# Altium PCB MCU_BOARD.PcbDoc
Units mm, origin at the board's own origin, x right, y up, seen from the top; angles counter-clockwise.
Board outline 89.4 x 99.75 mm, 2 copper layers (Top Layer, Bottom Layer), stack 1.569 mm thick; 81 components, 55 nets, 354 pads, 305 vias.
Unrouted connection lines stored in the file: 1.
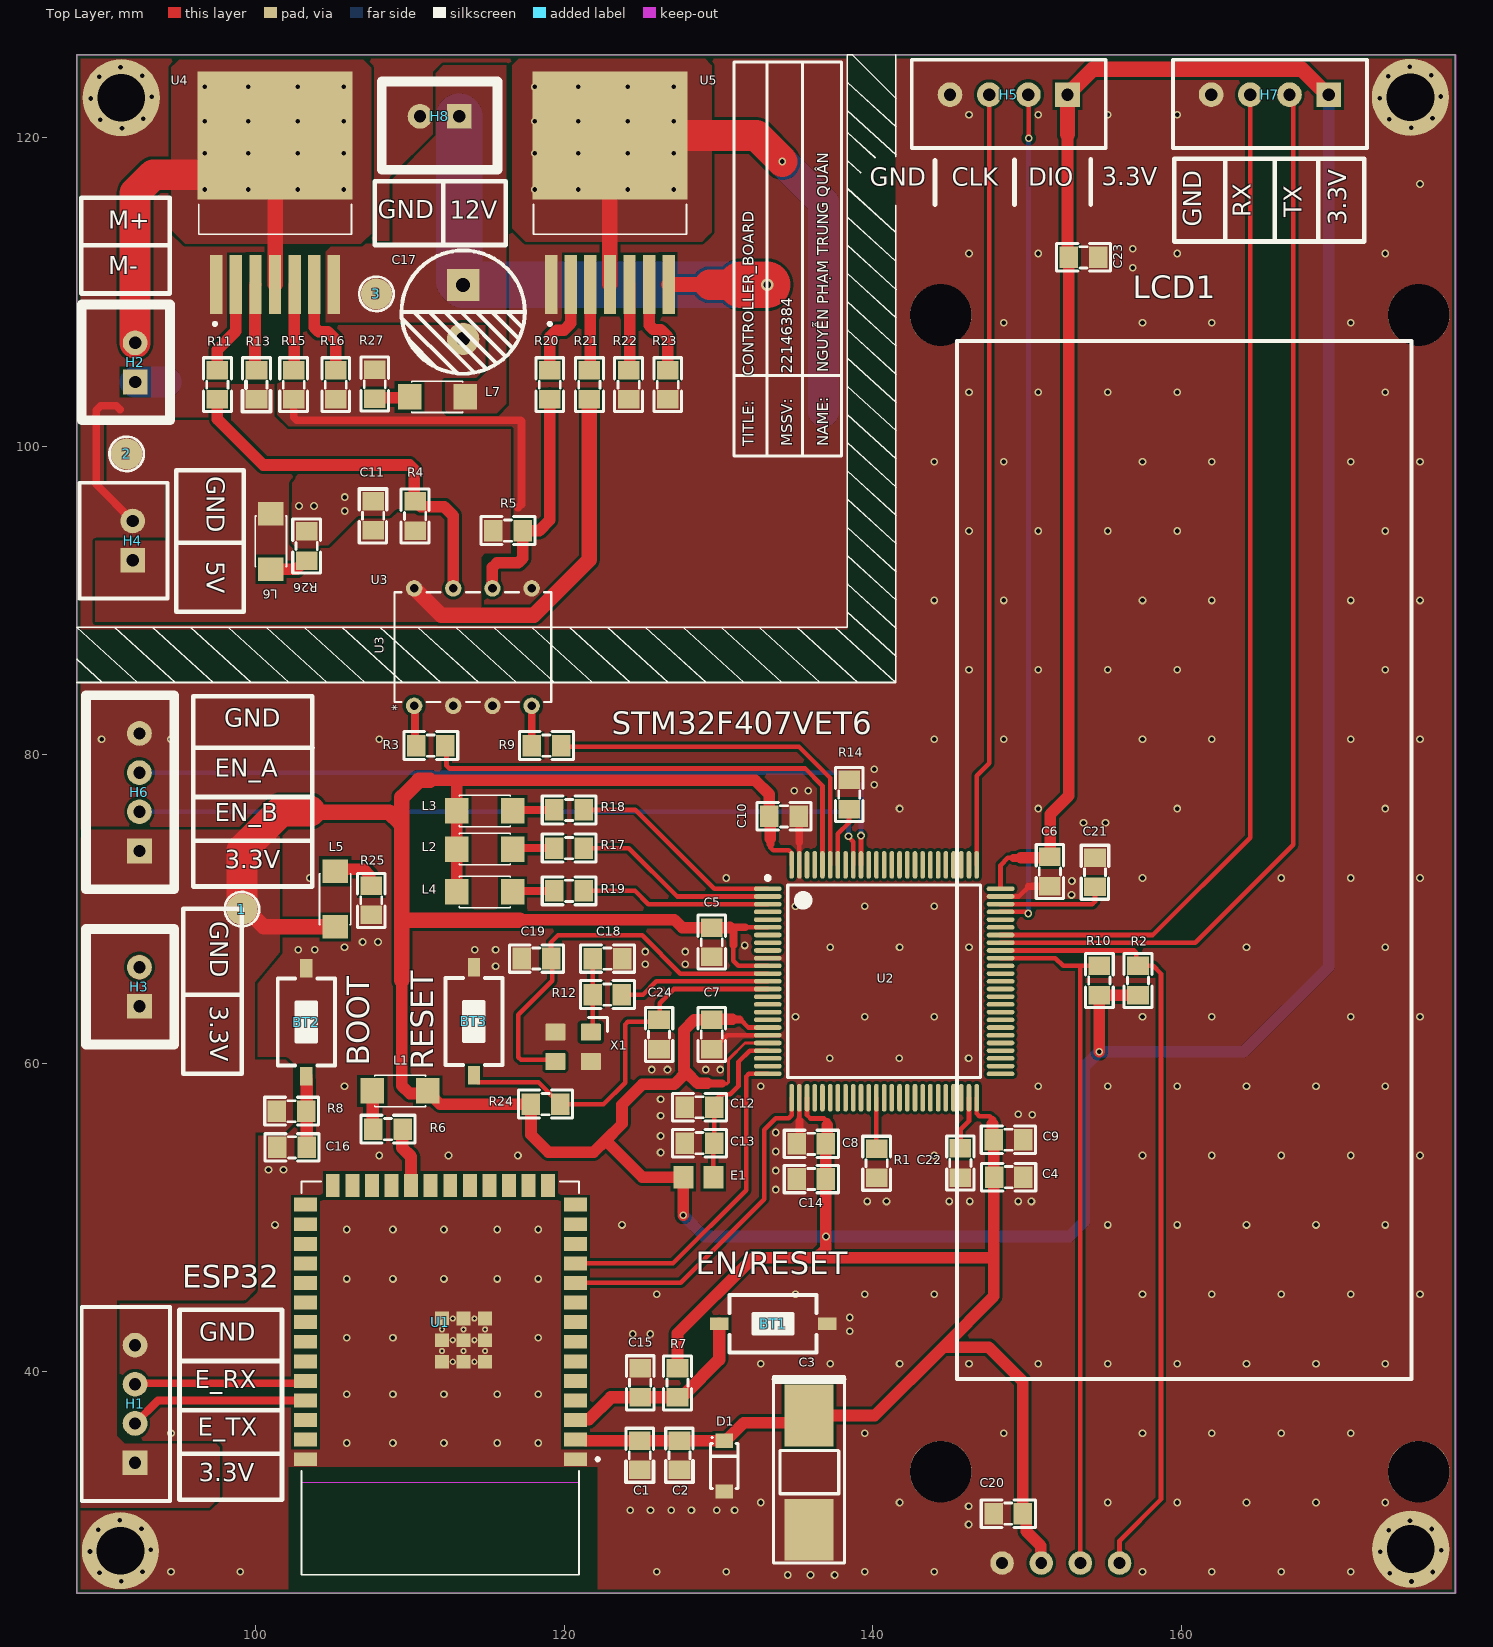
[diagram p0: Top Layer view]
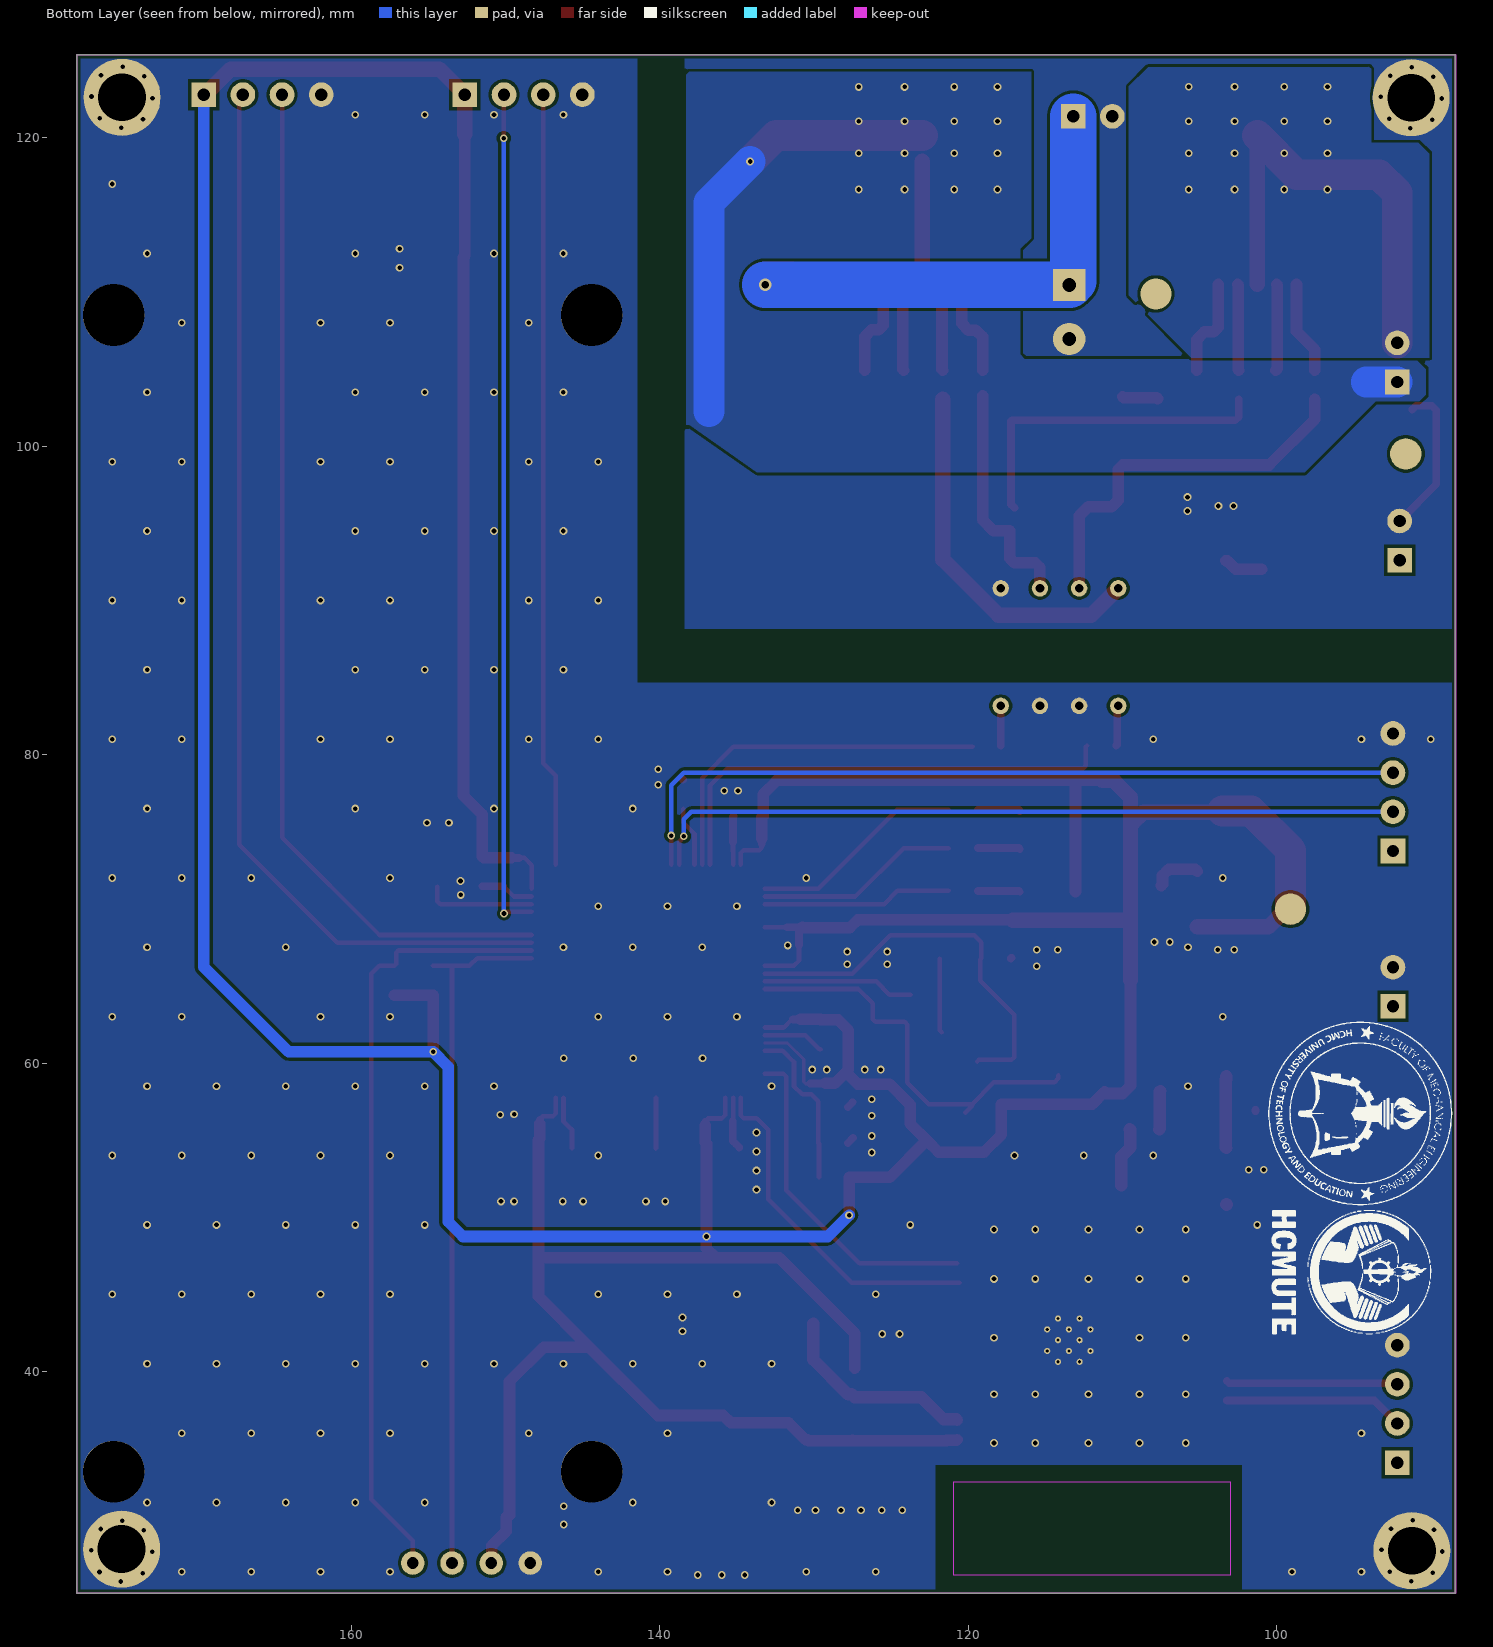
[diagram p1: Bottom Layer view, seen from below]
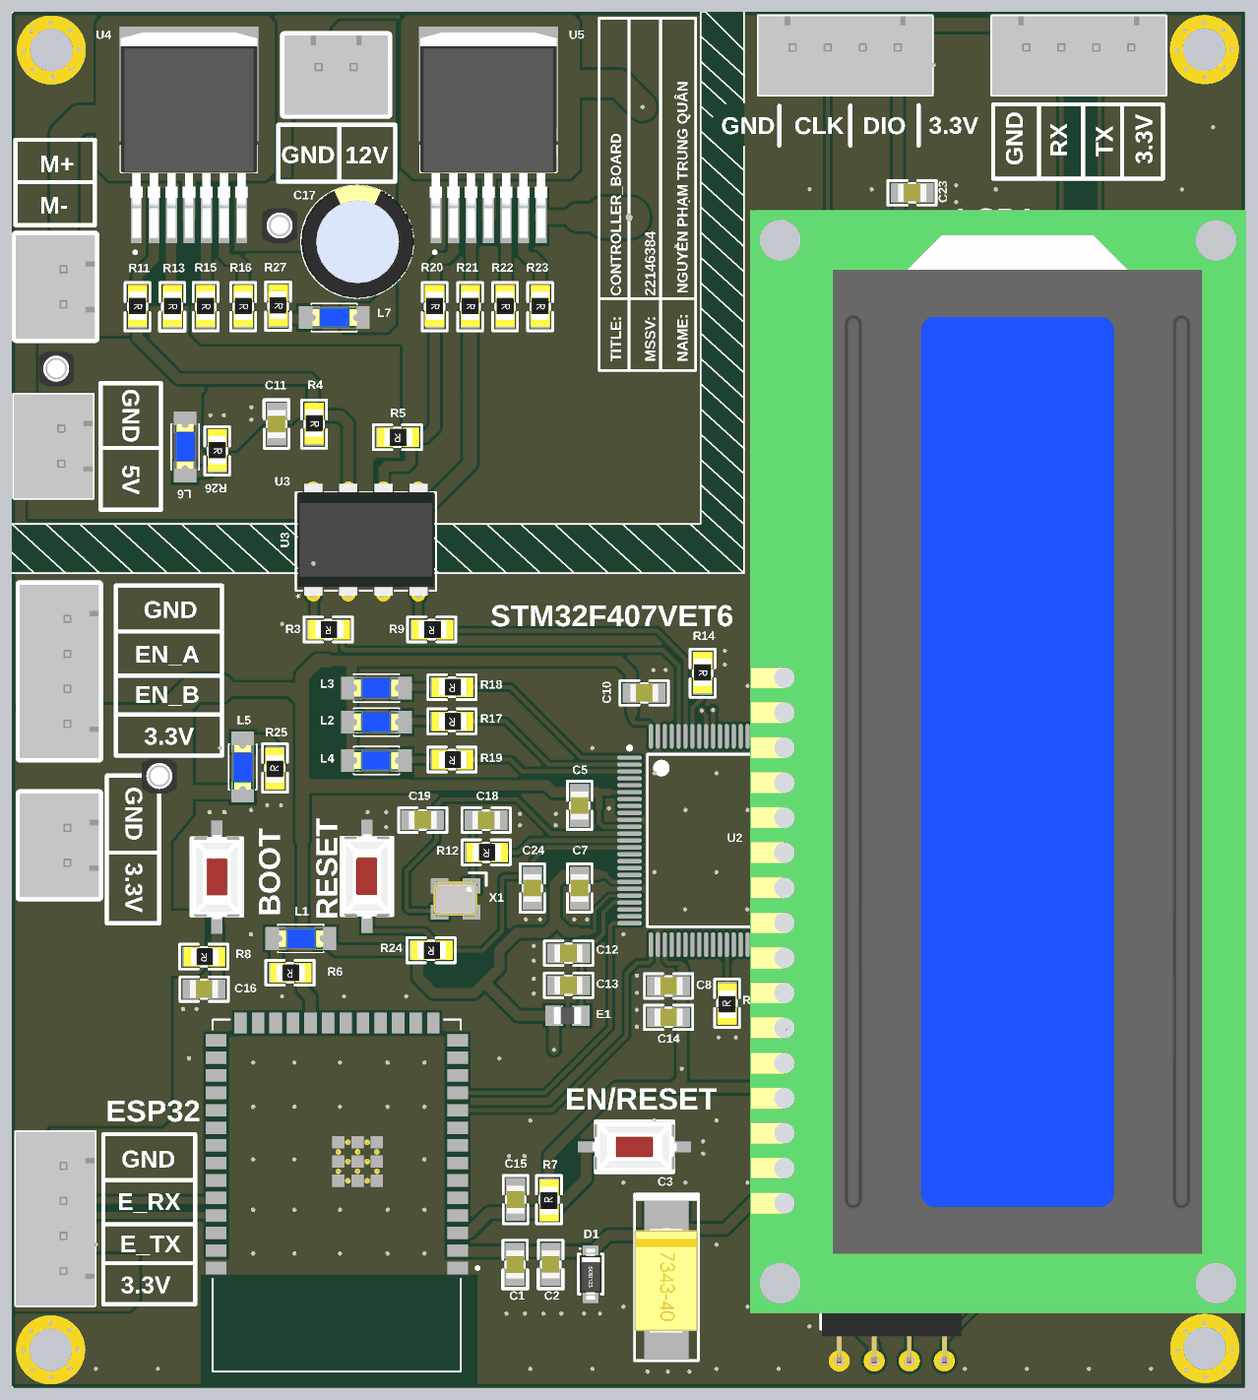
[diagram p2: 3D render of the assembled board from above, using the file's embedded part models]

## Layer stack, top to bottom
Top Solder: solder mask 0.0254, SM-001, Dk 4
Top Layer: signal copper 0.035
Dielectric 1: core 1.4986, Core-043, Dk 4.3
Bottom Layer: signal copper 0.035
Bottom Solder: solder mask 0.0254, SM-001, Dk 4

## Board outline
88.4,25.625 88.4,125.375 177.8,125.375 177.8,25.625

## Design rules (kind name [scope] priority, off if disabled: settings)
Clearance [All] p1: gap=0.2 ignorepadtopadclearanceinfootprint=FALSE
HoleSize [All] p1: absolutevalues=TRUE maxlimit=5 minlimit=0.025 maxpercent=80.000 minpercent=20.000
HoleToHoleClearance [All] p1: gap=0.01 allowstackedmicrovias=TRUE
PolygonConnect [All] p1: connectstyle=Direct reliefconductorwidth=0.254 reliefentries=4 polygonreliefangle="90 Angle" airgapwidth=0.254
RoutingVias [All] p1: holewidth=0.3 width=0.5 viastyle="Through Hole" minholewidth=0.3 minwidth=0.5 maxholewidth=0.3 maxwidth=0.5
SilkToSilkClearance [All] p1: silktosilkclearance=0.01
SilkToSolderMaskClearance [IsPad] p1: minsilkscreentomaskgap=0 clearancetoexposedcopper=TRUE
SolderMaskExpansion [IsVia] p1: expansion=0.102 istentingtop=TRUE useseparateexpansions=TRUE expansionbottom=0.102 istentingbottom=TRUE
SupplyNets "Schematic Supply Nets_1" [InNet('3.3VDDA')] p1: voltage=0.000
SupplyNets "Schematic Supply Nets_5" [InNet('5V_CS')] p2: voltage=0.000
SupplyNets "Schematic Supply Nets_4" [InNet('12V_CS')] p3: voltage=0.000
SupplyNets "Schematic Supply Nets_3" [InNet('GND_CS')] p4: voltage=0.000
SupplyNets "Schematic Supply Nets_2" [InNet('GND')] p5: voltage=0.000
SupplyNets "Schematic Supply Nets" [InNet('3.3V')] p6: voltage=0.000
UnRoutedNet [All] p1: checkbadconnections=TRUE
Width [All] p1: maxlimit=3 minlimit=0.2 preferedwidth=0.3
25 further rules are at their usual default settings.

## Components (designator, comment, footprint, x,y, rotation, side; value= is the part's Value field where it differs from the comment)
1 "3.3V" TP1 99.1,69.975 r90 top value="Test Point"
2 "5V" TP1 91.625,99.5 r90 top value="Test Point"
3 "12V" TP1 107.825,109.875 r90 top value="Test Point"
BT1 "Nut Nhan 2 Chan SMD 3x6x2.5" "Nut Nhan 2 Chan SMD 3x6x2.5" 133.55,43.09 r0 top
BT2 "Nut Nhan 2 Chan SMD 3x6x2.5" "Nut Nhan 2 Chan SMD 3x6x2.5" 103.275,62.65 r90 top
BT3 "Nut Nhan 2 Chan SMD 3x6x2.5" "Nut Nhan 2 Chan SMD 3x6x2.5" 114.15,62.7 r270 top
C1 "104" "tu 0805" 124.9,34.565 r270 top
C2 "22uf" "tu 0805" 127.475,34.565 r90 top
C3 "100uF" "tu tantalum smd7343" 135.875,33.44 r270 top
C4 "106" "tu 0805" 148.825,52.6 r0 top
C5 "104" "tu 0805" 129.572,67.84 r270 top
C6 "104" "tu 0805" 151.5,72.425 r270 top
C7 "104" "tu 0805" 129.575,61.85 r270 top
C8 "104" "tu 0805" 136.025,54.75 r180 top
C9 "104" "tu 0805" 148.8,55.025 r0 top
C10 "104" "tu 0805" 134.25,76 r0 top
C11 "104" "tu 0805" 107.601,95.479 r90 top
C12 "104" "tu 0805" 128.775,57.125 r180 top
C13 "106" "tu 0805" 128.775,54.8 r180 top
C14 "106" "tu 0805" 136.025,52.475 r180 top
C15 "106" "tu 0805" 124.925,39.263 r90 top
C16 "104" "tu 0805" 102.35,54.525 r180 top
C17 "100uF" "tu hoa 8mm" 113.45,108.7 r270 top
C18 "22pF" "tu 0805" 122.797,66.775 r0 top
C19 "22pF" "tu 0805" 118.2,66.775 r180 top
C20 "104" "tu 0805" 148.8,30.775 r180 top
C21 "225" "tu 0805" 154.422,72.371 r90 top
C22 "225" "tu 0805" 145.7,53.525 r270 top
C23 "104" "tu 0805" 153.675,112.25 r0 top
C24 "104" "tu 0805" 126.15,61.85 r270 top
D1 "BZT52H-C3V3" SOD123 130.375,33.865 r90 top
E1 "LI0805H121R-10" FB_LI0805H121R-10 128.7,52.6 r180 top
H1 "LOADER ESSP32" XH2.54M-4 92.171,34.087 r90 top
H2 "MOTOR" XH2.54M-2 92.175,104.16 r90 top
H3 "Header 2P 2.54 Duc Thang" XH2.54M-2 92.456,63.675 r90 top
H4 "Header 2P 2.54 Duc Thang" XH2.54M-2 92.025,92.61 r90 top
H5 "Header 4P 2.54 Duc Thang" XH2.54M-4 152.64,122.8 r180 top
H6 "ENCODER" XH2.54M-4 92.456,73.75 r90 top
H7 "UART3" XH2.54M-4 169.575,122.8 r180 top
H8 "Header 2P 2.54 Duc Thang" XH2.54M-2 113.189,121.387 r180 top
L1 "LED 1206" LED-1206-Blue 111.157,58.19 r180 top
L2 "LED 1206" LED-1206-Blue 113.043,73.875 r0 top
L3 "LED 1206" LED-1206-Blue 113.043,76.348 r0 top
L4 "LED 1206" LED-1206-Blue 113.043,71.098 r0 top
L5 "LED 1206" LED-1206-Blue 105.15,68.825 r90 top
L6 "LED 1206" LED-1206-Blue 100.975,95.625 r270 top
L7 "LED 1206" LED-1206-Blue 113.582,103.2 r180 top
LCD1 "LCD 1602" LCD-I2C-1602 141.918,31.004 r90 top
R1 "10k" "tro smd 0805" 140.2,53.5 r90 top
R2 "10k" "tro smd 0805" 157.15,65.35 r90 top
R3 "220R" "tro smd 0805" 111.35,80.525 r180 top
R4 "10k" "tro smd 0805" 110.395,95.479 r270 top
R5 "10k" "tro smd 0805" 116.364,94.463 r180 top
R6 "10k" "tro smd 0805" 108.575,55.65 r180 top
R7 "10k" "tro smd 0805" 127.289,39.261 r90 top
R8 "10k" "tro smd 0805" 102.329,56.814 r180 top
R9 "220R" "tro smd 0805" 118.85,80.525 r180 top
R10 "10k" "tro smd 0805" 154.766,65.35 r270 top
R11 "10k" "tro smd 0805" 97.575,103.988 r270 top
R12 "220R" "tro smd 0805" 122.8,64.375 r180 top
R13 "10k" "tro smd 0805" 100.108,103.988 r270 top
R14 "10k" "tro smd 0805" 138.55,77.425 r270 top
R15 "10k" "tro smd 0805" 102.521,103.988 r270 top
R16 "10k" "tro smd 0805" 105.249,103.988 r270 top
R17 "10k" "tro smd 0805" 120.325,73.877 r180 top
R18 "10k" "tro smd 0805" 120.325,76.35 r180 top
R19 "10k" "tro smd 0805" 120.325,71.1 r180 top
R20 "10k" "tro smd 0805" 119.125,103.988 r270 top
R21 "10k" "tro smd 0805" 121.698,103.988 r270 top
R22 "10k" "tro smd 0805" 124.238,103.988 r270 top
R23 "10k" "tro smd 0805" 126.778,103.988 r270 top
R24 "10k" "tro smd 0805" 118.8,57.275 r180 top
R25 "10k" "tro smd 0805" 107.425,70.55 r90 top
R26 "10k" "tro smd 0805" 103.361,93.529 r270 top
R27 "10k" "tro smd 0805" 107.775,104.025 r270 top
U1 "ESP32-S3-WROOM-1-N4" XCVR_ESP32-S3-WROOM-1-N4 111.975,39.565 r180 top
U2 "STM32F407VET6" STM-LQFP100_N 140.748,65.3 r0 top
U3 "HCPL2631" DIP_PL2631_ONS 110.268,83.16 r90 top
U4 "BTS7960B" DPAK127P1490X440-8N 101.251,116.434 r90 top
U5 "BTS7960B" DPAK127P1490X440-8N 122.968,116.434 r90 top
X1 "8Mhz" XTAL_3225 120.575,61.05 r180 top

## Footprints (in the part's own frame and the unit in brackets; to place one, negate y for a bottom-side part, rotate by r counter-clockwise, add the part's x,y. Pads: shape width x height; smd on the part's side, far side on the other; paste and mask are expansions set on the pad)
DIP_PL2631_ONS [mil]
  round 42 hole 22: 1(0,0) 2(0,-100) 3(0,-200) 4(0,-300) 5(300,-300) 6(300,-200) 7(300,-100) 8(300,0)
  silkscreen extent 10,-350 290,50, body extent -5,-345 315,45, height 205
DPAK127P1490X440-8N [mm]
  rect 3.81x0.8 smd: 1(-5.95,3.81) 2(-5.95,2.54) 3(-5.95,1.27) 4(-5.95,0) 5(-5.95,-1.27) 6(-5.95,-2.54) 7(-5.95,-3.81)
  rect 8.29x10.07 smd: 8(3.71,0)
  silkscreen extent -8.6,-4.95 -0.75,4.95, body extent -7.45,-4.95 7.45,4.95, height 4.4
FB_LI0805H121R-10 [mm]
  rect 1.285x1.47 smd: 1(-0.973,0) 2(0.973,0)
  body extent -1,-0.63 1,0.63, height 1.1
LCD-I2C-1602 [mm]
  round 1.524 hole 0.762: 1(-3.429,-6.477) 2(-3.429,-9.017) 3(-3.429,-11.557) 4(-3.429,-14.097)
  round 4 hole 4: 13(2.5,-2.5) 13(2.5,-33.5) 13(77.5,-33.5) 13(77.5,-2.5)
  silkscreen extent 8.51,-33.02 75.82,-3.56, body extent -3.6,-36 80,0, height 17
LED-1206-Blue [mil] "Compoment SMD 120x60mil"
  rect 60x65 smd: 1(0,0) 2(142,0)
  silkscreen extent 6,-40 136,40, body extent 7,-31 133,32, height 43
"Nut Nhan 2 Chan SMD 3x6x2.5" [mm] "Switch SMD type"
  rect 1.2x0.8 smd: 1(-3.5,0) 2(3.5,0)
  silkscreen extent -2.82,-1.85 2.82,1.85, body extent -3.05,-1.85 3.05,1.85, height 2.5
SOD123 [mm] "Molded Diode, 2-Leads, Body 2.7x1.6mm, IPC Medium Density"
  rect 0.91x1.143 smd: 1(-1.64,0) 2(1.64,0)
  silkscreen extent -1.45,-0.9 1.9,0.9, body extent -1.85,-0.78 1.85,0.77, height 1.35
STM-LQFP100_N [mm] "Thin QFP, 100-Leads, Body 14x14mm, Pitch 0.5mm, IPC Medium Density"
  oval 1.8x0.3 smd: 1(-7.55,6) 2(-7.55,5.5) 3(-7.55,5) 4(-7.55,4.5) 5(-7.55,4) 6(-7.55,3.5) 7(-7.55,3) 8(-7.55,2.5) 9(-7.55,2) 10(-7.55,1.5) 11(-7.55,1) 12(-7.55,0.5) 13(-7.55,0) 14(-7.55,-0.5) 15(-7.55,-1) 16(-7.55,-1.5) 17(-7.55,-2) 18(-7.55,-2.5) 19(-7.55,-3) 20(-7.55,-3.5) 21(-7.55,-4) 22(-7.55,-4.5) 23(-7.55,-5) 24(-7.55,-5.5) 25(-7.55,-6) 51(7.55,-6) 52(7.55,-5.5) 53(7.55,-5) 54(7.55,-4.5) 55(7.55,-4) 56(7.55,-3.5) 57(7.55,-3) 58(7.55,-2.5) 59(7.55,-2) 60(7.55,-1.5) 61(7.55,-1) 62(7.55,-0.5) 63(7.55,0) 64(7.55,0.5) 65(7.55,1) 66(7.55,1.5) 67(7.55,2) 68(7.55,2.5) 69(7.55,3) 70(7.55,3.5) 71(7.55,4) 72(7.55,4.5) 73(7.55,5) 74(7.55,5.5) 75(7.55,6)
  oval 0.3x1.8 smd: 26(-6,-7.55) 27(-5.5,-7.55) 28(-5,-7.55) 29(-4.5,-7.55) 30(-4,-7.55) 31(-3.5,-7.55) 32(-3,-7.55) 33(-2.5,-7.55) 34(-2,-7.55) 35(-1.5,-7.55) 36(-1,-7.55) 37(-0.5,-7.55) 38(0,-7.55) 39(0.5,-7.55) 40(1,-7.55) 41(1.5,-7.55) 42(2,-7.55) 43(2.5,-7.55) 44(3,-7.55) 45(3.5,-7.55) 46(4,-7.55) 47(4.5,-7.55) 48(5,-7.55) 49(5.5,-7.55) 50(6,-7.55) 76(6,7.55) 77(5.5,7.55) 78(5,7.55) 79(4.5,7.55) 80(4,7.55) 81(3.5,7.55) 82(3,7.55) 83(2.5,7.55) 84(2,7.55) 85(1.5,7.55) 86(1,7.55) 87(0.5,7.55) 88(0,7.55) 89(-0.5,7.55) 90(-1,7.55) 91(-1.5,7.55) 92(-2,7.55) 93(-2.5,7.55) 94(-3,7.55) 95(-3.5,7.55) 96(-4,7.55) 97(-4.5,7.55) 98(-5,7.55) 99(-5.5,7.55) 100(-6,7.55)
  silkscreen extent -7.67,-6.25 6.25,6.82, body extent -7,-7 7,7, height 1.6
TP1 [mil] "Test point"
  round 80 all layers, no hole: 1(0,0)
  silkscreen extent -44,-44 44,44, body extent -50,-50 50,50, height 178
"tro smd 0805" [mm]
  rect 1.2x1.4 smd: 1(-0.946,-0.061) 2(0.954,-0.061)
  silkscreen extent -1.75,-0.97 1.75,0.84, body extent -1.56,-0.76 1.44,0.64, height 0.53
"tu 0805" [mm] "Compoment SMD 80x50mil"
  rect 1.2x1.4 smd: 1(-0.946,-0.003) 2(0.954,-0.003)
  silkscreen extent -1.75,-0.89 1.75,0.89, body extent -1.01,-0.64 1.01,0.63, height 0.61
"tu hoa 8mm" [mm]
  rect 2.1x2.1 hole 0.9: 1(-1.75,0)
  round 2.1 hole 0.9: 2(1.75,0)
  silkscreen extent -4,-4 4,4, body extent -4.1,-4.07 4.1,4.13, height 13.81
"tu tantalum smd7343" [mm]
  rect 4x3.2 smd: 1(-3.7,0) 2(3.7,0)
  silkscreen extent -6.23,-2.31 5.85,2.31, body extent -3.75,-2.33 3.85,2.27, height 3.99
XCVR_ESP32-S3-WROOM-1-N4 [mm]
  rect 1.5x0.9 smd: 1(-8.75,5.26) 2(-8.75,3.99) 3(-8.75,2.72) 4(-8.75,1.45) 5(-8.75,0.18) 6(-8.75,-1.09) 7(-8.75,-2.36) 8(-8.75,-3.63) 9(-8.75,-4.9) 10(-8.75,-6.17) 11(-8.75,-7.44) 12(-8.75,-8.71) 13(-8.75,-9.98) 14(-8.75,-11.25) 27(8.75,-11.25) 28(8.75,-9.98) 29(8.75,-8.71) 30(8.75,-7.44) 31(8.75,-6.17) 32(8.75,-4.9) 33(8.75,-3.63) 34(8.75,-2.36) 35(8.75,-1.09) 36(8.75,0.18) 37(8.75,1.45) 38(8.75,2.72) 39(8.75,3.99) 40(8.75,5.26)
  rect 0.9x1.5 smd: 15(-6.985,-12.5) 16(-5.715,-12.5) 17(-4.445,-12.5) 18(-3.175,-12.5) 19(-1.905,-12.5) 20(-0.635,-12.5) 21(0.635,-12.5) 22(1.905,-12.5) 23(3.175,-12.5) 24(4.445,-12.5) 25(5.715,-12.5) 26(6.985,-12.5)
  rect 0.9x0.9 smd: 41_1(-1.5,-2.46) 41_2(-2.9,-2.46) 41_3(-0.1,-2.46) 41_4(-2.9,-3.86) 41_5(-1.5,-3.86) 41_6(-0.1,-3.86) 41_7(-2.9,-1.06) 41_8(-1.5,-1.06) 41_9(-0.1,-1.06)
  round 0.4 hole 0.2: GND(-2.9,-3.16) GND(-2.9,-1.76) GND(-2.2,-1.06) GND(-2.2,-3.86) GND(-2.2,-2.46) GND(-1.5,-1.76) GND(-1.5,-3.16) GND(-0.8,-1.06) GND(-0.8,-2.46) GND(-0.8,-3.86) GND(-0.1,-1.76) GND(-0.1,-3.16)
  Keep-Out Layer region: 9,6.75 -9,6.75 -9,12.75 9,12.75
  Keep-Out Layer region: 9,6.75 -9,6.75 -9,12.75 9,12.75
  silkscreen extent -10.3,-12.75 9,12.75
XH2.54M-2 [mm]
  rect 1.6x1.6 hole 0.8: 1(0,0)
  round 1.6 hole 0.8: 2(2.54,0)
  silkscreen extent -2.48,-2.26 5.02,3.46, body extent -2.48,-2.26 5.02,3.48, height 6.91
XH2.54M-4 [mm]
  rect 1.6x1.6 hole 0.8: 1(0,0)
  round 1.6 hole 0.8: 2(2.54,0) 3(5.08,0) 4(7.62,0)
  silkscreen extent -2.48,-2.26 10.1,3.46, body extent -2.48,-2.26 10.1,3.48, height 6.91
XTAL_3225 [mm]
  rrect10% 1.3x1.1 smd: 1(-1.15,-0.95) 2(1.15,-0.95) 3(1.15,0.95) 4(-1.15,0.95)
  silkscreen extent -2.23,-1.89 -1,-1, body extent -1.6,-1.28 1.6,1.22, height 0.61

## Part data
1 2 3: library part TP1, "Test Point"
C1 C5 C6 C7 C8 C9 C10 C11 C12 C16 C20 C23 C24: library part "Tu 0805 104 50V 10%", "Dán", Chung_Loai=Dán, Don_Vi=Con, Ma_Hang=MH004551, So_Chan=2, Ten_Linh_Kien="Tụ 0805 104-100nF 10% 50V"
C2: library part "Tu 0805 222 50V 10%", "Dán", Chung_Loai=Dán, Don_Vi=Con, Ma_Hang=MH004557, So_Chan=2, Ten_Linh_Kien="Tụ 0805 222-2.2nF 10% 50V"
C3: library part "Tu tantalum 100uF 50V SMD7343", "Dán", Chung_Loai=Dán, Don_Vi=Con, Ma_Hang=MH008401, So_Chan=2, Ten_Linh_Kien="Tụ tantalum 107T-100uF 50V SMD7343"
C4 C13 C14 C15: library part "Tu 0805 106 16V 10%", "Dán", Chung_Loai=Dán, Don_Vi=Con, Ma_Hang=MH004553, So_Chan=2, Ten_Linh_Kien="Tụ 0805 106-10uF 10% 16V"
C17: library part "Tu Hoa 100uF 35V 8x11", "Cắm", Chung_Loai=Cắm, Don_Vi=Con, Ma_Hang=MH002807, So_Chan=2, Ten_Linh_Kien="Tụ Hóa 100uF 35V 8x11MM"
C18 C19: library part "Tu 0805 22pF 50V 10%", "Dán", Chung_Loai=Dán, Don_Vi=Con, Ma_Hang=MH004560, So_Chan=2, Ten_Linh_Kien="Tụ 0805 22P 10% 50V"
C21 C22: library part "Tu 0805 225 25V 10%", "Dán", Chung_Loai=Dán, Don_Vi=Con, Ma_Hang=MH007483, So_Chan=2, Ten_Linh_Kien="Tụ 0805 225-2.2uF 25V 10%"
D1: library part "Diode Zener", "Zener Diode"
E1: "EMI Ferrite Chip Bead, 0805, 800MA, 120Ohms @100MHz, DCR Max 0.150Ohm", PACKAGE="0805 Laird", Check_prices=https://www.snapeda.com/parts/LI0805H121R-10/Laird/view-part/?ref=eda, MF=Laird, MP=LI0805H121R-10, SnapEDA_Link=https://www.snapeda.com/parts/LI0805H121R-10/Laird/view-part/?ref=snap
H1 H6 H7: library part "Header 4P 2.54 Duc Thang", "Cắm", Chung_Loai=Cắm, Don_Vi=Con, Ma_Hang=MH001285, Ten_Linh_Kien="Header 4P XH2.54-4P Đực Thẳng"
H2: library part "Header 2P 2.54 Duc Thang", "Cắm", Chung_Loai=Cắm, Don_Vi=Con, Ma_Hang=MH001283, Ten_Linh_Kien="Header 2P XH2.54-2P Đực Thẳng"
H3 H4 H5 H8: "Cắm", Chung_Loai=Cắm, Don_Vi=Con
  H3 H4 H8: Ma_Hang=MH001283, Ten_Linh_Kien="Header 2P XH2.54-2P Đực Thẳng"
  H5: Ma_Hang=MH001285, Ten_Linh_Kien="Header 4P XH2.54-4P Đực Thẳng"
L1 L2 L3 L4 L5 L6 L7: library part "LED 1206 Xanh Duong", "Dán", Chung_Loai=Dán, Don_Vi=Con, Ma_Hang=MH002333, Ten_Linh_Kien="LED1206 Màu Xanh Dương (Blue)"
R1 R2 R6 R10 R14 R17 R18 R19 R24 R25 R26 R27: library part "Tro 0805 1% 10k", "Dán", Chung_Loai=Dán, Don_Vi=Con, Ma_Hang=MH005473, So_Chan=2, Ten_Linh_Kien="Trở 0805 1% 10k"
R3 R9 R12: library part "Tro 0805 5% 220R", "Dán", Chung_Loai=Dán, Don_Vi=Con, Ma_Hang=MH005259, So_Chan=2, Ten_Linh_Kien="Trở 0805 5% 220R"
R4 R5 R7 R8 R11 R13 R15 R16 R20 R21 R22 R23: library part "Tro 0805 5% 10k", "Dán", Chung_Loai=Dán, Don_Vi=Con, Ma_Hang=MH005239, So_Chan=2, Ten_Linh_Kien="Trở 0805 5% 10k"
U1: PACKAGE=None, Availability=Unavailable, MF="{'manufacturer': u'Espressif Systems'}", MP=ESP32-S3-WROOM-1-N4, Price=None
U2: library part CMP-0243-00016-3, "ARM Cortex-M4 32-bit MCU+FPU, 210 DMIPS, 512 kB Flash, 192 kB Internal RAM, 82 I/Os, 100-pin LQFP, -40 to 85 degC, Tray", I/Os (High Current)=82, Manufacturer=STMicroelectronics, Operating Frequency(F) (Processor speed) (MHz)=168, Supply Voltage(Vcc) max (V)=3.6, Supply Voltage(Vcc) min (V)=1.8, ComponentLink1Description="Manufacturer URL", ComponentLink1URL=http://www.st.com/web/en/home.html, ComponentLink2Description=Datasheet, ComponentLink2URL=http://www.st.com/st-web-ui/static/active/en/resource/technical/document/datasheet/DM00037051.pdf, ComponentLink3Description="Package Specification", ComponentLink3URL=http://www.st.com/st-web-ui/static/active/en/resource/technical/document/data_brief/DM00071938.pdf, Core="ARM Cortex-M4", D/A Converter=2x12-bit, DatasheetVersion="Rev. 4", FLASH Size (Prog) (kB)=512, Internal RAM Size (kB)=192, Mounting Technology="Surface Mount", PackageDescription="100-Pin Low Profile Quad Flat Package, 14 x 14 mm Body, 0.5 mm Pitch", PackageReference=LQFP100, PackageVersion="Rev. 1, 06/2013", Packing=Tray, PartNumber=STM32F407VET6
U3: "Description", Manufacturer_Name=onsemi, Copyright="Copyright (C) 2025 Ultra Librarian. All rights reserved.", Manufacturer_Part_Number=HCPL2631, RefDes=RefDes, TYPE=Type
U4 U5: "Half Bridge Driver DC Motors, General Purpose DMOS PG-TO263-7-1", PACKAGE="TO-263 Infineon", Check_prices=https://www.snapeda.com/parts/BTS7960B/Infineon/view-part/?ref=eda, MF=Infineon, MP=BTS7960B, SnapEDA_Link=https://www.snapeda.com/parts/BTS7960B/Infineon/view-part/?ref=snap
X1: library part TSX-3225_24.0000MF15X-AC, "Crystal SMD 24MHz 10PPM 7pF 3225", Manufacturer=Epson, Manufacturer Part Number="TSX-3225 24.0000MF15X-AC"
BT1 BT2 BT3: Ma_Hang=MH001036, Ten="Nút Nhấn 2 Chân 3x6x2.5MM SMD"

## Free pads (board coordinates)
  round 5 hole 3.1: ""(91.225,28.375) ""(91.275,122.6) ""(174.875,122.625) ""(174.9,28.475)

## Via types
v1: diameter 0.5, hole 0.3, Top Layer to Bottom Layer, tented both sides, 272 vias
v2: diameter 0.3, hole 0.3, Top Layer to Bottom Layer, tented both sides, 32 vias
v3: diameter 0.8, hole 0.5, Top Layer to Bottom Layer, tented both sides, 1 vias

## Nets (pads, with @x,y where several pads share a name; then routed paths per layer and width w, separated by ;. In a path a pad name is that pad's centre, name@x,y a point inside that pad or via, vN(x,y) a via of type N, cw(c..) or ccw(c..) an arc to the next point about the centre after c; other vN are vias at no path point)
3.3V: 1.1 C1.1 C2.2 C3.1 C4.1 C5.1 C6.1 C7.1 C8.1 C9.1 C10.1 C14.1 C20.1 C23.1 D1.2 E1.2 H1.1 H3.1 H5.1 H6.1 H7.1 L1.1 L2.1 L3.1 L4.1 L5.1 LCD1.2 R2.1 R7.2 R8.2 R10.2 R24.2 U1.2 U2.6 U2.11 U2.19 U2.21 U2.28 U2.50 U2.75 U2.100 | length 447.4
  Top Layer w0.2: 130.25,58.675 130.275,58.65 130.545,58.65 130.663,58.767 130.663,60.238 131.725,61.3 U2.21
  Top Layer w0.3: 130.975,67.65 130.975,66.625 131.3,66.3 U2.11 ; 131.375,62.825 131.425,62.825 131.95,62.3 U2.19 ; 131.75,68.8 U2.6 ; 133.379,74.2 133.379,73.972 133.555,73.796 134.572,73.796 134.748,73.62 U2.100 ; U2.28 135.748,56.627 135.975,56.4 136.874,56.4 137.05,56.224 137.05,56.175 ; U2.50 146.748,56.726 146.924,56.55 147.599,56.55 147.775,56.374 147.775,56.3 ; U2.75 148.298,72.823 148.775,73.3 149.125,73.3
  Top Layer w0.5: R8.2 R8.2@101.375,56.975 ; 129.275,58.675 130.25,58.675 ; 130.736,68.786 130.975,68.546 130.975,67.65 ; 130.75,68.8 131.75,68.8 ; 130.9,62.825 131.375,62.825 ; 133.375,74.55 133.379,74.546 133.379,74.2 ; 137.05,55.975 137.05,56.175 ; 147.775,56.075 147.775,56.3 ; 149.125,73.3 149.625,73.3
  Top Layer w0.75: 109.475,65.375 109.475,58.525 109.975,58.025 111.055,58.025 111.157,58.126 111.948,57.336 R24.2 117.846,55.354 118.975,54.225 121.925,54.225 122.663,54.963 ; 111.3,78.325 113,78.325 ; L4.1 L2.1 L3.1 113.043,78.282 113,78.325 ; 117.125,69.25 117.175,69.3 127.15,69.3 127.664,68.786 C5.1 130.736,68.786 130.75,68.8 ; U1.2 120.775,35.525 121.409,35.525 121.424,35.511 C1.1 124.901,35.515 127.474,35.515 C2.2 127.493,35.505 D1.2 130.43,35.56 130.547,35.56 131.652,36.665 135.4,36.665 C3.1 140.14,37.14 144.575,41.575 ; R7.2 127.35,42.475 132.25,47.375 136.375,47.375 ; v1(127.725,50.125) 127.727,50.127 E1.2 125.075,52.6 122.712,54.963 122.663,54.963 ; 129.275,58.675 128.65,58.675 127.925,59.4 ; 130.9,62.825 129.601,62.825 C7.1 128.439,62.796 127.768,62.125 127.768,59.557 127.925,59.4 ; 133.375,74.55 133.375,75.926 C10.1 133.304,77.421 132.4,78.325 113,78.325 ; 137.05,55.975 137.05,54.833 C8.1 C14.1 136.971,48.754 v1(136.975,48.75) 136.975,47.975 136.375,47.375 ; 147.775,56.075 147.775,55.101 C9.1 147.867,55.009 C4.1@147.867,52.609 ; C4.1 C4.1@147.867,52.609 ; 149.625,73.3 151.426,73.3 C6.1 151.525,73.399 151.525,76.125 152.729,77.329 C23.1 152.64,112.336 152.64,120.235 ; C20.1@149.746,30.678 C20.1 ; LCD1.2 150.911,27.599 150.911,28.689 149.964,29.636 149.964,30.56 C20.1 ; v1(154.7,60.725) 154.705,60.73 R10.2 154.714,64.404 R2.1 ; 122.663,54.963 123.75,56.05 123.75,57.3 125.075,58.625 127.15,58.625 127.925,59.4 ; 136.375,47.375 147.867,47.375 ; 144.575,41.575 147.525,41.575 149.746,39.354 C20.1 ; 144.575,41.575 147.867,44.867 147.867,47.375 ; 147.867,47.375 C4.1@147.867,52.609
  Top Layer w1: 1.1 99.379,69.975 100.529,68.825 L5.1 ; 103.525,76.325 103.6,76.25 108.65,76.25 109.375,75.525 ; 109.475,65.375 109.475,69.125 ; 111.3,78.325 110.575,78.325 109.475,77.225 109.475,69.125 ; 117.125,69.25 109.6,69.25 109.475,69.125 ; 152.64,120.235 H5.1@152.64,122.625 ; H5.1 154.29,124.45 167.825,124.45 H7.1@169.575,122.7
  Top Layer w2: 1.1 99.1,73.8 101.648,76.348 103.502,76.348 103.525,76.325
  Bottom Layer w0.75: v1(127.725,50.125) 129.1,48.75 v1(136.975,48.75) 152.761,48.75 153.73,49.72 153.73,59.755 v1(154.7,60.725) 164.075,60.725 169.575,66.225 H7.1@169.575,122.7
3.3VDDA: C12.1 C13.1 E1.1 U2.22 | length 10.7
  Top Layer w0.3: E1.1 129.673,54.756 C13.1 ; C13.1@129.721,54.828 C12.1 129.721,57.203 129.721,57.278 129.721,57.353 129.721,57.428 129.721,57.525 130.171,57.975 130.771,57.975 131.3,58.504 131.3,60.068 132.032,60.8 U2.22
5V_CS: 2.1 C11.1 H4.1 L6.1 R4.2 R5.2 R13.2 R21.2 U3.8 | length 24
  Top Layer w1: U3.8 110.286,90.78 112.016,89.05 118.044,89.05 121.637,92.643 R21.2
12V_CS: 3.1 C17.1 H8.1 L7.1 U4.7 U5.7 | length 37.1
  Top Layer w1: U5.7 129.426,110.484 129.445,110.465
  Top Layer w2: 129.445,110.465 131.477,110.465
  Top Layer w3: 131.477,110.465 v3(133.165,110.465)
  Bottom Layer w3: H8.1 113.189,110.711 113.435,110.465 v3(133.165,110.465)
ENCODER_A: H6.3 U2.91 | length 52.3
  Top Layer w0.3: U2.91 139.248,74.658 139.25,74.66 v1(139.25,74.75)
  Bottom Layer w0.3: H6.3 138.445,78.83 139.25,78.025 v1(139.25,74.75)
ENCODER_B: H6.2 U2.92 | length 49.3
  Top Layer w0.3: v1(138.438,74.713) 138.438,74.659 138.748,74.349 U2.92
  Bottom Layer w0.3: H6.2 137.96,76.29 138.438,75.812 v1(138.438,74.713)
ESP/RXD2: U1.10 U2.26 | length 22.5
  Top Layer w0.3: U1.10@120.567,45.75 127.55,45.75 132.975,51.175 132.975,55.675 133.725,56.425 134.572,56.425 134.748,56.601 U2.26
ESP/TXD2: U1.11 U2.25 | length 21.9
  Top Layer w0.3: U1.11 127.055,47.005 131.8,51.75 131.8,59.124 131.976,59.3 U2.25
ESP_BOOT: BT2.1 C16.1 R8.1 U1.27 | length 4.7
  Top Layer w0.8: U1.27 U1.27@103.26,50.85 ; C16.1@103.26,54.493 C16.1 103.296,58.929 103.275,58.95 BT2.1
ESP_RST: BT1.1 C15.1 R7.1 U1.3 | length 13.3
  Top Layer w0.8: U1.3 120.775,36.895 121.606,36.895 123.028,38.318 C15.1 124.931,38.315 R7.1 127.55,38.515 127.799,38.515 130.05,40.766 BT1.1
ESP_RX: H1.3 U1.36 | length 11.1
  Top Layer w0.5: H1.3 92.244,39.24 103.08,39.24 U1.36
ESP_TX: H1.2 U1.37 | length 11.7
  Top Layer w0.5: H1.2 93.659,38.115 U1.37
GND: BT1.2 BT2.2 BT3.1 C1.2 C2.1 C3.2 C4.2 C5.2 C6.2 C7.2 C8.2 C9.2 C10.2 C12.2 C13.2 C14.2 C15.2 C16.2 C18.2 C19.2 C20.2 C21.2 C22.2 C23.2 C24.2 D1.1 H1.4 H3.2 H5.4 H6.4 H7.4 LCD1.1 LCD1.13 pad.@91.225,28.375 pad.@174.9,28.475 pad.@174.875,122.625 R1.1 R14.1 R25.1 U1.1 U1.40 U1.41_1 U1.41_2 U1.41_3 U1.41_4 U1.41_5 U1.41_6 U1.41_7 U1.41_8 U1.41_9 U1.GND U2.10 U2.20 U2.27 U2.74 U2.99 U3.2 U3.3 X1.2 X1.4 | length 15.1
  Top Layer w0.3: C7.2 129.672,60.896 130.576,61.8 U2.20 ; U2.27 135.248,56.252 135.262,56.238 ; U2.99 135.248,73.691 135.25,73.693 135.25,74.321 135.248,74.323 ; U2.74 149.475,70.8 150.146,71.471
  Top Layer w0.5: C19.2@117.199,66.825 C19.2 ; C13.2@127.474,55.15 C13.2 ; C12.2@127.499,57.45 C12.2 ; C8.2@134.842,54.525 C8.2 135.262,54.945 135.262,56.238 ; C10.2 135.248,75.953 135.248,74.323 ; R14.1 R14.1@138.55,78.431 ; 150.146,71.471 C6.2
  other v1: 134.5,26.8 135.975,26.8 137.535,26.8 94.5,27 99,27 126,27 130.5,27 139.5,27 144,27 157.5,27 162,27 166.5,27 171,27 146.225,30.075 124.275,31 125.6,31 126.95,31 128.25,31 129.9,31 131.05,31 146.225,31.25 132.75,31.5 141.75,31.5 155.25,31.5 159.75,31.5 164.25,31.5 168.75,31.5 173.25,31.5 105.9,35.361 108.892,35.361 112.2,35.361 115.65,35.361 118.325,35.361 94.5,36 139.5,36 148.5,36 157.5,36 162,36 166.5,36 171,36 105.9,38.525 108.892,38.525 112.2,38.525 115.65,38.525 118.325,38.525 132.75,40.5 137.25,40.5 141.75,40.5 146.25,40.5 150.75,40.5 155.25,40.5 159.75,40.5 164.25,40.5 168.75,40.5 173.25,40.5 105.9,42.175 108.892,42.175 118.325,42.175 124.45,42.425 125.575,42.425 138.525,42.6 138.525,43.5 126,45 135,45 139.5,45 144,45 157.5,45 162,45 166.5,45 171,45 175.5,45 105.9,46 108.892,46 112.2,46 115.65,46 118.325,46 105.9,49.2 108.892,49.2 112.2,49.2 115.65,49.2 118.325,49.2 101.25,49.5 123.75,49.5 155.25,49.5 159.75,49.5 164.25,49.5 168.75,49.5 173.25,49.5 139.65,51.025 140.9,51.025 144.975,51.025 146.3,51.025 149.45,51.025 150.3,51.025 133.725,51.792 133.725,53.025 100.825,53.075 101.8,53.075 108,54 112.5,54 117,54 144,54 157.5,54 162,54 166.5,54 171,54 175.5,54 126.25,54.2 133.725,54.258 126.25,55.267 133.725,55.492 126.25,56.583 150.35,56.65 149.45,56.675 126.25,57.65 105.75,58.5 132.75,58.5 150.75,58.5 155.25,58.5 159.75,58.5 164.25,58.5 168.75,58.5 173.25,58.5 125.675,59.574 126.703,59.574 129.175,59.574 130.113,59.574 137.225,60.3 141.725,60.3 146.225,60.3 103.5,63 135,63 139.5,63 144,63 157.5,63 162,63 171,63 175.5,63 115.55,66.275 125.25,66.4 127.85,66.4 125.25,67.225 127.85,67.225 102.75,67.35 103.825,67.35 114.2,67.35 115.55,67.35 105.75,67.5 137.25,67.5 141.75,67.5 146.25,67.5 164.25,67.5 173.25,67.5 131.7,67.625 106.925,67.85 107.925,67.85 135,70.175 139.5,70.175 144,70.175 152.9,70.9 152.925,71.8 103.5,72 130.5,72 157.5,72 166.5,72 171,72 175.5,72 153.675,75.575 155.1,75.575 141.75,76.5 150.75,76.5 159.75,76.5 173.25,76.5 134.925,77.65 135.825,77.65 140.1,78.05 140.1,79.05 90,81 94.5,81 108,81 144,81 148.5,81 157.5,81 162,81 171,81 175.5,81 146.25,85.5 150.75,85.5 155.25,85.5 159.75,85.5 173.25,85.5 144,90 148.5,90 157.5,90 162,90 171,90 175.5,90 146.25,94.5 150.75,94.5 155.25,94.5 159.75,94.5 173.25,94.5 144,99 148.5,99 157.5,99 162,99 171,99 175.5,99 146.25,103.5 150.75,103.5 155.25,103.5 159.75,103.5 173.25,103.5 148.5,108 157.5,108 162,108 171,108 156.875,111.575 146.25,112.5 150.75,112.5 159.75,112.5 173.25,112.5 156.875,112.8 175.5,117 146.25,121.5 150.75,121.5 155.25,121.5 159.75,121.5
  other v2: 174.95,26.375 91.275,26.4 173.539,26.918 89.864,26.943 176.332,26.989 92.657,27.014 172.925,28.3 89.25,28.325 176.875,28.4 93.2,28.425 173.468,29.711 89.793,29.736 92.586,29.807 176.261,29.782 174.85,30.325 91.175,30.35 174.925,120.65 173.514,121.193 176.307,121.264 172.9,122.575 176.85,122.675 173.443,123.986 176.236,124.057 174.825,124.6
GND_CS: C11.2 C17.2 H4.2 H8.2 pad.@91.275,122.6 R15.2 R16.2 R22.2 R23.2 R26.1 R27.1 U3.5 U4.1 U5.1 | length 31.7
  Top Layer w0.5: 91.2,102.375 90.95,102.625 89.943,102.625 89.65,102.332 89.65,97.525 H4.2 ; R15.2 102.46,101.89 102.675,101.675 117.175,101.675 117.225,101.625 117.225,96.225 117,96
  other v1: 105.775,95.8 102.8,96.125 103.775,96.125 105.775,96.7
  other v2: 91.325,120.625 89.914,121.168 92.707,121.239 89.3,122.55 93.25,122.65 89.843,123.961 92.636,124.032 91.225,124.575
I2C3_SCL: LCD1.4 R2.2 U2.67 | length 50.8
  Top Layer w0.3: U2.67 156.95,67.3 157.091,67.159 157.091,66.425 R2.2 158.196,66.304 158.7,65.8 158.7,31.7 156.015,29.015 LCD1.4
I2C3_SDA: LCD1.3 R10.1 U2.66 | length 45.3
  Top Layer w0.3: U2.66 151.85,66.8 152.354,66.296 153.475,66.296 ; LCD1.3 153.475,66.296 ; R10.1 153.475,66.296
LED/PWM: R19.1 U2.3 | length 12.3
  Top Layer w0.3: R19.1 124.589,71.161 125.45,70.3 U2.3
LED/UART: R18.1 U2.1 | length 14
  Top Layer w0.3: R18.1 124.614,76.411 129.725,71.3 U2.1
LED/VEL: R17.1 U2.2 | length 13.2
  Top Layer w0.3: R17.1 124.188,73.937 127.325,70.8 U2.2
LPWM: R5.1 R20.2 U3.6 | length 15.5
  Top Layer w0.75: U3.6 115.348,92.138 115.641,92.431 117.017,92.431 117.31,92.724 R5.1 118.374,94.524 119.064,95.214 R20.2@119.064,103.268
M+: H2.2 U4.4 U4.8 | length 30
  Top Layer w1: U4.4 U4.8
  Top Layer w2: H2.2 92.175,116.428 93.347,117.6 98.707,117.6 U4.8
  other v1: 96.7,116.65 99.5,116.65 102.727,116.65 105.7,116.65 96.7,119 99.5,119 102.727,119 105.7,119 96.7,121.075 99.5,121.075 102.727,121.075 105.7,121.075 96.7,123.302 99.5,123.302 102.727,123.302 105.7,123.302
M-: H2.1 U5.4 U5.8 | length 39.2
  Top Layer w1: U5.4 U5.8@122.968,118.466
  Top Layer w2: U5.8 132.466,120.144 v1(134.144,118.466)
  Bottom Layer w2: H2.1 94.19,104.16 ; v1(134.144,118.466) 136.817,115.793 136.817,102.245
  other v1: 118.1,116.648 120.9,116.648 124.127,116.648 127.1,116.648 118.1,118.998 120.9,118.998 124.127,118.998 127.1,118.998 118.1,121.073 120.9,121.073 124.127,121.073 127.1,121.073 118.1,123.3 120.9,123.3 124.127,123.3 127.1,123.3
MCU_LPWM: R3.1 U2.96 | length 31.4
  Top Layer w0.3: R3.1 112.371,80.511 112.371,79.276 112.546,79.1 135.625,79.1 136.748,77.977 U2.96
MCU_RPWM: R9.1 U2.95 | length 24
  Top Layer w0.3: R9.1@119.715,80.5 135.229,80.5 137.248,78.481 U2.95
NetC18_1: C18.1 R12.2 X1.1 | length 5
  Top Layer w0.3: R12.2 121.85,64.44 121.85,64.461 X1.1@121.85,62.125 ; R12.2@121.85,64.475 121.85,66.77 C18.1 ; X1.1@121.85,62.125 X1.1 X1.1@121.85,62.125
NetC19_1: C19.1 U2.12 X1.3 | length 26.2
  Top Layer w0.3: X1.3 119.325,60.2 117.201,60.2 117.025,60.376 117.025,63.125 119.225,65.325 119.225,66.699 C19.1 119.146,67.821 119.6,68.275 125.05,68.275 127.525,65.8 U2.12
NetC21_1: C21.1 U2.73 | length 7.1
  Top Layer w0.3: U2.73 154.249,70.3 154.425,70.476 C21.1
NetC22_1: C22.1 U2.49 | length 3.5
  Top Layer w0.3: C22.1 145.697,55.685 146.248,56.236 U2.49
NetL1_2: L1.2 R6.2 | length 2.5
  Top Layer w0.8: L1.2 107.585,58.155 107.585,55.746 R6.2
NetL2_2: L2.2 R17.2 | length 2.7
  Top Layer w0.5: L2.2 116.712,73.937 R17.2
NetL3_2: L3.2 R18.2 | length 2.7
  Top Layer w0.5: L3.2 116.712,76.411 R18.2
NetL4_2: L4.2 R19.2 | length 2.7
  Top Layer w0.5: L4.2 116.712,71.161 R19.2
NetL5_2: L5.2 R25.2 | length 3.2
  Top Layer w0.75: L5.2 105.282,72.564 106.997,72.564 107.4,72.161 107.4,71.59 R25.2
NetL6_2: L6.2 R26.2 | length 2.6
  Top Layer w0.75: L6.2 102.643,92.018 103.2,92.575 R26.2
NetL7_2: L7.2 R27.2 | length 2.3
  Top Layer w0.75: R27.2 107.779,103.135 109.91,103.135 L7.2
NetR1_2: R1.2 U2.37 | length 3.3
  Top Layer w0.3: U2.37 140.248,54.467 R1.2
NetR3_2: R3.2 U3.1 | length 2.6
  Top Layer w0.5: U3.1 110.332,83.096 110.332,80.65 R3.2
NetR6_1: R6.1 U1.22 | length 3.9
  Top Layer w0.8: R6.1 109.5,55.69 109.5,54.5 110.07,53.93 U1.22
NetR9_2: R9.2 U3.4 | length 2.6
  Top Layer w0.3: R9.2@117.888,80.593 R9.2
  Top Layer w0.5: R9.2@117.888,80.593 U3.4
NetR11_1: R11.1 U4.2 | length 6
  Top Layer w0.75: R11.1 97.514,106.264 98.711,107.461 U4.2
NetR12_1: R12.1 U2.13 | length 9.8
  Top Layer w0.3: R12.1 125.111,64.436 125.975,65.3 U2.13
NetR13_1: R13.1 U4.3 | length 5.6
  Top Layer w0.75: U4.3 99.951,110.454 99.951,105.03 R13.1
NetR14_2: R14.2 U2.94 | length 3.9
  Top Layer w0.3: U2.94 137.748,73.6 137.748,74.872 138.473,75.596 138.473,76.454 R14.2
NetR15_1: R15.1 U4.5 | length 5.6
  Top Layer w0.75: R15.1 102.491,104.964 102.491,110.454 U4.5
NetR16_1: R16.1 U4.6 | length 6.5
  Top Layer w0.75: U4.6 103.791,107.71 104.084,107.417 104.68,107.417 105.188,106.909 R16.1
NetR20_1: R20.1 U5.2 | length 6.4
  Top Layer w0.75: R20.1 119.064,107.086 119.504,107.525 119.989,107.525 120.428,107.964 U5.2
NetR21_1: R21.1 U5.3 | length 5.6
  Top Layer w0.75: R21.1 121.698,104.994 U5.3
NetR22_1: R22.1 U5.5 | length 5.6
  Top Layer w0.75: R22.1 124.238,104.994 U5.5
NetR23_1: R23.1 U5.6 | length 6.3
  Top Layer w0.75: U5.6 125.508,107.837 125.801,107.544 126.27,107.544 126.717,107.097 R23.1
PA13/SWDIO: H5.2 U2.72 | length 55
  Top Layer w0.3: U2.72 149.946,69.8 150.046,69.7 v1(150.1,69.7) ; H5.2 150.125,122.775 v1(150.125,119.975)
  Bottom Layer w0.3: v1(150.1,69.7) 150.112,69.712 150.112,119.962 v1(150.125,119.975)
PA14/SWCLK: H5.3 U2.76 | length 50.1
  Top Layer w0.3: U2.76 146.748,78.623 147.56,79.435 H5.3@147.56,122.625
RESET: BT3.2 C24.1 R24.1 U2.14 | length 26.5
  Top Layer w0.3: BT3.2 114.15,59 114.4,58.75 118.331,58.75 R24.1 ; R24.1@119.746,57.236 R24.1@120.196,56.786 ; R24.1@119.746,57.325 122.55,57.325 123.95,58.725 123.95,62.499 124.126,62.675 126.026,62.675 126.2,62.849 126.2,63.875 127.125,64.8 U2.14
RPWM: R4.1 R11.2 U3.7 | length 25
  Top Layer w0.75: R11.2 97.514,101.756 100.489,98.781 109.975,98.781 110.268,98.488 110.268,96.491 R4.1 110.684,96.075 112.22,96.075 112.808,95.487 U3.7
WIN/RX: H7.3 U2.69 | length 66.9
  Top Layer w0.3: U2.69 158.175,68.3 164.495,74.62 H7.3@164.495,122.7
WIN/TX: H7.2 U2.68 | length 70.4
  Top Layer w0.3: U2.68 160.925,67.8 167.275,74.15 167.275,122.56 H7.2
pads on no net: U1.4 U1.5 U1.6 U1.7 U1.8 U1.9 U1.12 U1.13 U1.14 U1.15 U1.16 U1.17 U1.18 U1.19 U1.20 U1.21 U1.23 U1.24 U1.25 U1.26 U1.28 U1.29 U1.30 U1.31 U1.32 U1.33 U1.34 U1.35 U1.38 U1.39 U2.4 U2.5 U2.7 U2.8 U2.9 U2.15 U2.16 U2.17 U2.18 U2.23 U2.24 U2.29 U2.30 U2.31 U2.32 U2.33 U2.34 U2.35 U2.36 U2.38 U2.39 U2.40 U2.41 U2.42 U2.43 U2.44 U2.45 U2.46 U2.47 U2.48 U2.51 U2.52 U2.53 U2.54 U2.55 U2.56 U2.57 U2.58 U2.59 U2.60 U2.61 U2.62 U2.63 U2.64 U2.65 U2.70 U2.71 U2.77 U2.78 U2.79 U2.80 U2.81 U2.82 U2.83 U2.84 U2.85 U2.86 U2.87 U2.88 U2.89 U2.90 U2.93 U2.97 U2.98

## Polygon pours and split planes (outlines as drawn)
GND on Top Layer "GND_L01_P008" (solid, remove dead copper, pour order 8): 102.1,14.95 102.1,33.825 122.175,33.825 122.175,14.95 179.405,14.95 179.405,132.875 178.38,133.9 141.3,133.9 141.5,133.6 141.5,84.625 73.805,84.625 73.805,20.7 79.555,14.95
GND_CS on Top Layer "NONET_L-01_P-001" (solid, remove dead copper, pour order 16): 81.691,88.137 138.341,88.137 138.341,131.687 83.966,131.687 80.516,128.237
M+ on Top Layer "M+_L01_P000" (solid, remove dead copper, pour order 0): 95.028,125.07 94.52,124.562 94.52,114.021 95.409,113.132 106.839,113.132 107.474,113.767 107.474,124.562 106.966,125.07
M- on Top Layer "M-_L01_P001" (solid, remove dead copper, pour order 1): 117.126,125.197 116.618,124.689 116.618,114.148 117.507,113.259 128.937,113.259 129.572,113.894 129.572,124.689 129.064,125.197
12V_CS on Top Layer "12V_CS_L01_P002" (solid, remove dead copper, pour order 2): 115.094,108.052 115.094,104.944 114.375,104.225 112.275,104.225 112.275,102.325 112.625,101.975 115.475,101.975 116.237,102.737 116.237,124.689 112.173,124.689 111.665,124.181 111.665,120.15 108.871,117.356 108.871,113.132 105.061,113.132 104.553,112.624 104.553,108.052
5V_CS on Top Layer "5V_CS_L01_P003" (solid, remove dead copper, pour order 3): 116.536,93.053 114.861,93.053 114.611,92.803 114.611,88.6 95.155,88.6 89.6,88.6 89.6,93.855 94.295,93.855 94.3,93.85 94.3,97.725 94.25,97.775 90.35,97.775 90.35,101.675 98.425,101.675 98.425,104.013 98.427,104.015 101.2,104.015 101.2,101.955 102.061,101.094 116.536,101.094
GND_CS on Top Layer "NONET_L-01_P-001" (solid, remove dead copper, pour order 9): 102.325,93.575 104.7,93.575 106.625,95.5 108.675,95.5 109.05,95.875 109.05,97.6 108.8,97.85 102.55,97.85 102.55,97.825 102.35,97.625
3.3V on Top Layer "3.3V_L01_P006" (solid, remove dead copper, pour order 6): 101.55,74.675 100.9,75.125 100.7,75.125 89.175,75.125 88.45,74.4 88.475,74.375 88.475,31.175 96.975,31.175 97.65,31.85 97.65,35.3 91.5,35.3 90.975,35.825 90.975,44.575 91,44.6 99.275,44.6 99.95,45.275 99.95,55.5 101.875,55.5 102.4,56.025 102.4,59.75 101.95,60.2 99.925,60.2 99.925,65.225 101.55,67.175
GND_CS on Bottom Layer "NONET_L-01_P-001" (solid, remove dead copper, pour order 15): 81.725,88.175 138.375,88.175 138.375,131.725 84,131.725 80.55,128.275
M- on Bottom Layer "NONET_L-01_P-001" (solid, remove dead copper, pour order 11): 115.925,124.275 138.075,124.275 138.275,124.075 138.275,101.4 138.1,101.4 133.7,98.3 132.6,98.3 98.175,98.3 93.575,102.9 90.75,102.9 90.325,103.325 90.325,105 90.975,105.65 116.325,105.65 116.625,105.95 116.625,112.8 115.925,113.5
GND on Bottom Layer "GND_L02_P007" (solid, remove dead copper, pour order 7): 102.225,16.69 102.225,33.95 122.125,33.95 122.125,18.683 122.975,16.69 181.135,16.69 181.135,134.615 180.11,135.64 141.425,135.64 141.475,135.525 141.475,84.675 75.61,84.675 75.535,84.6 75.535,22.44 81.285,16.69
M+ on Bottom Layer "NONET_L-01_P-001" (solid, remove dead copper, pour order 10): 109.575,109.775 105.55,105.75 90.225,105.75 90.1,105.75 90.1,118.975 90.8,119.675 93.875,119.675 93.875,124.612 108.327,124.585 109.575,123.337

## Keep-outs
Keep-Out Layer:
  the board outline again, w0.1

## Silkscreen, mask and mechanical layers (free items; w line width, h text height)
Top Overlay:
  lines w0.1: 88.4,84.675 141.5,84.675 141.5,115.625 ; 88.4,88.248 92.325,84.673 ; 88.4,88.25 138.35,88.25 138.35,125.375 138.695,125.375 141.519,122.552 ; 88.401,86.179 90.027,84.698 ; 90.859,88.248 94.784,84.673 ; 93.317,88.248 97.242,84.673 ; 95.776,88.248 99.701,84.673 ; 98.235,88.248 102.16,84.673 ; 100.694,88.248 104.619,84.673 ; 103.152,88.248 107.077,84.673 ; 105.611,88.248 109.536,84.673 ; 108.07,88.248 111.995,84.673 ; 110.529,88.248 114.454,84.673 ; 112.987,88.248 116.912,84.673 ; 115.446,88.248 119.371,84.673 ; 117.905,88.248 121.83,84.673 ; 120.364,88.248 124.289,84.673 ; 122.822,88.248 126.747,84.673 ; 125.281,88.248 129.206,84.673 ; 127.74,88.248 131.665,84.673 ; 130.199,88.248 134.124,84.673 ; 132.657,88.248 136.582,84.673 ; 135.116,88.248 139.041,84.673 ; 137.575,88.248 141.5,84.673 ; 138.35,116.73 141.466,113.892 ; 138.375,89.236 141.519,86.372 ; 138.375,91.066 141.519,88.202 ; 138.375,92.896 141.519,90.032 ; 138.375,94.726 141.519,91.862 ; 138.375,96.556 141.519,93.692 ; 138.375,98.386 141.519,95.522 ; 138.375,100.215 141.519,97.352 ; 138.375,102.045 141.519,99.182 ; 138.375,103.875 141.519,101.012 ; 138.375,105.705 141.519,102.842 ; 138.375,107.535 141.519,104.672 ; 138.375,109.365 141.519,106.502 ; 138.375,111.195 141.519,108.332 ; 138.375,113.025 141.519,110.162 ; 138.375,114.855 141.491,112.017 ; 138.375,116.685 139.129,115.999 ; 138.375,118.515 139.216,117.75 ; 138.375,120.345 140.167,118.713 ; 138.375,121.755 141.519,118.892 ; 138.375,123.585 141.519,120.722 ; 141.5,118.775 141.5,125.375
  lines w0.2: 131,104.582 137.985,104.582 ; 133.159,99.375 133.159,124.902 ; 135.445,99.375 135.445,124.902 ; 131,99.375 137.985,99.375 137.985,124.902 131,124.902 131,99.375
  lines w0.3: 88.675,113.025 94.425,113.025 ; 94.85,93.75 99.225,93.75 ; 95.05,37.55 95.125,37.475 101.7,37.475 ; 95.075,40.675 101.675,40.675 ; 95.1,34.65 101.675,34.65 ; 95.325,64.425 99.1,64.425 ; 95.95,77.325 96.025,77.25 103.65,77.25 ; 95.975,74.425 103.575,74.425 ; 95.975,80.45 103.675,80.45 ; 99.075,70 95.3,70 95.3,59.3 99.1,59.3 99.1,69.975 ; 112.15,113.05 112.15,117.175 ; 144.05,115.675 144.05,118.55 ; 149.2,115.675 149.2,118.575 ; 154.15,115.675 154.15,118.6 ; 162.875,113.3 162.875,118.625 ; 166,113.275 166.075,113.35 166.075,118.625 ; 168.9,113.325 168.9,118.65 ; 88.675,109.9 94.425,109.9 94.425,116.1 88.675,116.1 88.675,109.9 ; 94.85,89.275 99.225,89.275 99.225,98.45 94.85,98.45 94.85,89.275 ; 95.05,31.675 95.05,44 101.7,44 101.7,31.675 95.05,31.675 ; 95.95,71.45 103.65,71.45 103.65,83.775 95.95,83.775 95.95,71.45 ; 107.725,113.05 116.2,113.05 116.2,117.175 107.725,117.175 107.725,113.05 ; 159.55,113.275 159.55,118.65 171.875,118.65 171.875,113.275 159.55,113.275
  text "3.3V" at 154.875,116.524 h2
  text "GND" at 139.825,116.507 h2
  text "CLK" at 145.125,116.507 h2
  text "DIO" at 150.1,116.507 h2
  text "RX" at 164.925,114.85 h2 r90
  text "TX" at 168.225,114.85 h2 r90
  text "GND" at 107.925,114.399 h2
  text "12V" at 112.575,114.375 h2
  text "3.3V" at 171.101,114.325 h2 r90
  text "GND" at 161.701,114.225 h2 r90
  text "M+" at 90.425,113.725 h2
  text "M-" at 90.425,110.75 h2
  text "TITLE:     CONTROLLER_BOARD" at 132.566,100.01 h1.2 r90
  text "MSSV:     22146384" at 135.05,100.01 h1.2 r90
  text "NAME:     NGUYỄN PHẠM TRUNG QUÂN" at 137.393,100.01 h1.2 r90
  text "GND" at 96.424,98.05 h2 r270
  text "5V" at 96.424,92.525 h2 r270
  text "GND" at 97.95,81.424 h2
  text "STM32F407VET6" at 123.1,80.83 h2.5
  text "EN_A" at 97.325,78.179 h2
  text "EN_B" at 97.325,75.279 h2
  text "3.3V" at 98,72.249 h2
  text "GND" at 96.649,69.2 h2 r270
  text "3.3V" at 96.649,63.7 h2 r270
  text "BOOT" at 107.845,59.825 h2.5 r90
  text "RESET" at 111.995,59.575 h2.5 r90
  text "EN/RESET" at 128.525,45.805 h2.5
  text "ESP32" at 95.225,44.93 h2.5
  text "GND" at 96.35,41.599 h2
  text "E_RX" at 96.05,38.504 h2
  text "E_TX" at 96.248,35.454 h2
  text "3.3V" at 96.3,32.474 h2
Bottom Overlay:
  drawing of 357 lines, arcs and shapes, not listed

## Dimensions
88.4,25.625 to 88.4,125.375 on Top Overlay

## Text inside footprints (layer, text, board x,y; h text height)
U1: Mechanical 13 "ANTENNA" at 116.475,30.065 h1 r180
U3: Top Overlay "*" at 109.608,82.842 h1 r90; Mechanical 13 "*" at 110.903,83.477 h1 r90